# Altium PCB STM32F030K6T6 CH340.PcbDoc
Units mm, origin at the board's own origin, x right, y up, seen from the top; angles counter-clockwise.
Board outline 21.2 x 51.31 mm, 2 copper layers (Top Layer, Bottom Layer); 42 components, 45 nets, 173 pads, 12 vias.
Unrouted connection lines stored in the file: 4.
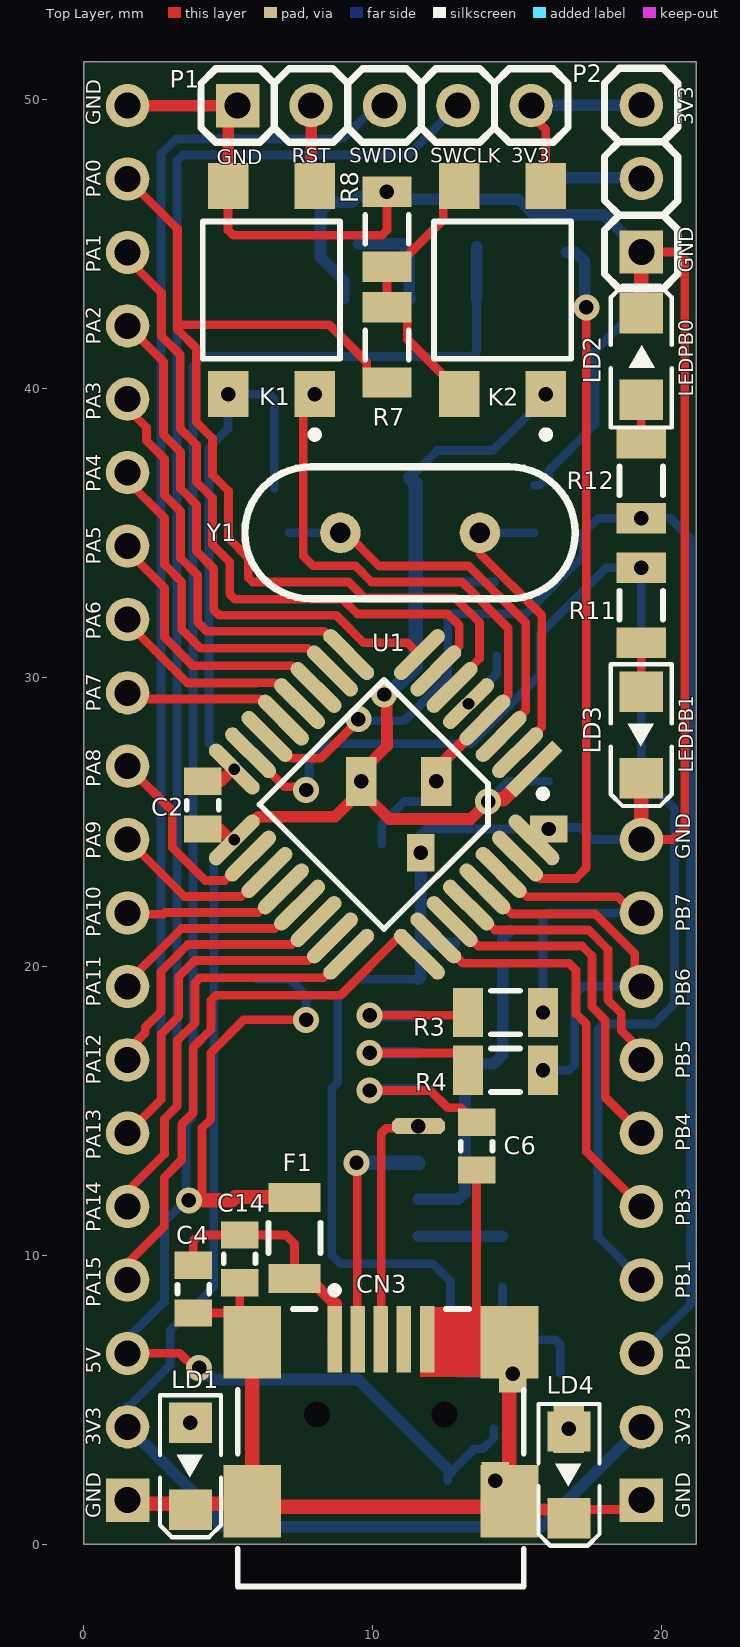
[diagram p0: Top Layer view]
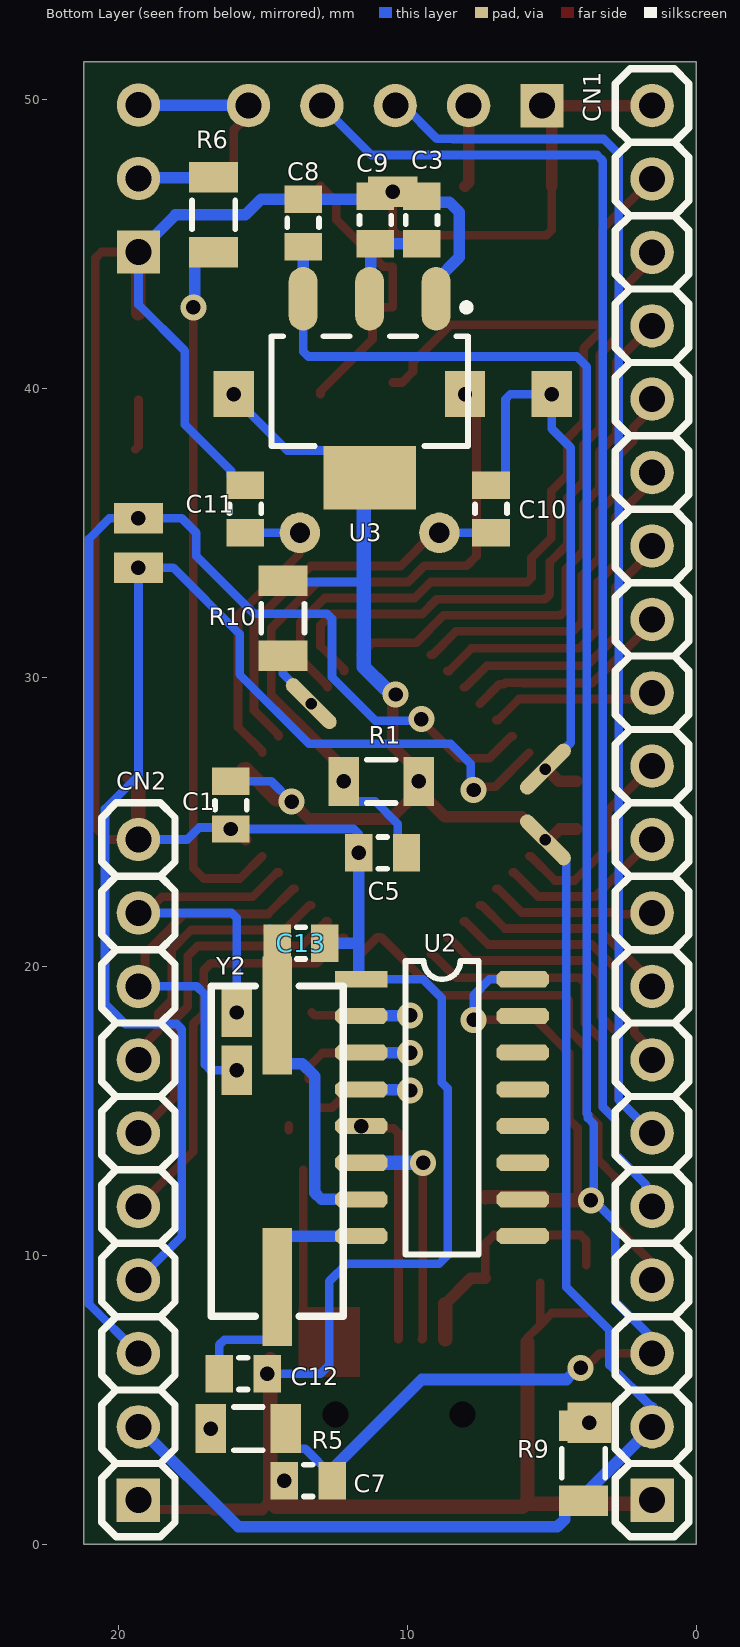
[diagram p1: Bottom Layer view, seen from below]

## Layer stack, top to bottom
Top Solder: solder mask 0.0102, Solder Resist, Dk 3.5
Top Layer: signal copper 0.0356
Dielectric 1: dielectric 0.32, FR-4, Dk 4.8
Bottom Layer: signal copper 0.0356
Bottom Solder: solder mask 0.0102, Solder Resist, Dk 3.5

## Board outline
0,0 21.2,0 21.2,51.308 0,51.308

## Design rules (kind name [scope] priority, off if disabled: settings)
Clearance [All] p1: gap=0.254 ignorepadtopadclearanceinfootprint=FALSE except(0: Arc-Hole Track-Hole SMDPad-Hole THPad-Hole Via-Hole Fill-Hole Poly-Hole Region-Hole Text-Hole)
PolygonConnect [All] p1: connectstyle=Relief reliefconductorwidth=0.254 reliefentries=4 polygonreliefangle="90 Angle" airgapwidth=0.254
RoutingVias [All] p1: holewidth=0.711 width=1.27 viastyle="Through Hole" minholewidth=0.711 minwidth=1.27 maxholewidth=0.711 maxwidth=1.27
SolderMaskExpansion [All] p1: expansion=0.102 istentingtop=FALSE
Width [All] p1: maxlimit=2 minlimit=0.254 preferedwidth=0.3 minimp=50.000000 maximp=50.000000 favimp=50.000000
30 further rules are at their usual default settings.

## Components (designator, comment, footprint, x,y, rotation, side; value= is the part's Value field where it differs from the comment)
C1 "100nF" CAP805#1 16.1,24.75 r90 bottom
C2 "100nF" CAP805#2 4.125,26.4 r270 top
C3 "100nF" CAP805#2 9.5,46.65 r270 bottom
C4 "10uF" CAP805#2 3.8,8 r90 top value=100nF
C5 "100nF" CAP805#1 11.675,23.925 r180 bottom
C6 "100nF" CAP805#2 13.6,12.95 r90 top
C7 "100nF" CAP805#1 14.25,2.2 r180 bottom
C8 "1uF" CAP805#2 13.6,46.55 r270 bottom value=100nF
C9 "1uF" CAP805#2 11.1,46.65 r270 bottom value=100nF
C10 "22pF" CAP805#2 7.1,35 r90 bottom value=100nF
C11 "22pF" CAP805#2 15.6,35 r90 bottom value=100nF
C12 "22pF" CAP805#3 16.5,5.9 r180 bottom value=100nF
C13 "22pF" CAP805#2 14.5,20.8 r180 bottom value=100nF
C14 "100nF" CAP805#2 5.4,9.05 r90 top
CN1 "MHDR_1X20" MHDR1X20-254P 1.524,1.524 r90 bottom locked
CN2 "MHDR_1X10" "MHDR1X10-254P - E" 19.304,1.524 r90 bottom locked
CN3 "USB Mini" USB/SM0.8-6H5 10.287,-0.762 r270 top locked
F1 "1206L025YR" FP-1206L025YR-MFG 7.3,10.6 r270 top
K1 "RESET" FP-TL3305AF260QG-MFG#1 6.5,43.4 r90 top locked
K2 "WAKE UP" FP-TL3305AF260QG-MFG#2 14.5,43.4 r90 top locked
LD1 "LED SMD PACKAGE" LED_SMD_1206#1 3.7,2.7 r90 top
LD2 "LED SMD PACKAGE" LED_SMD_1206#2 19.3,41.1 r270 top
LD3 "LED SMD PACKAGE" LED_SMD_1206#2 19.3,28 r90 top
LD4 "LED SMD PACKAGE" LED_SMD_1206#2 16.8,2.4 r90 top
P1 "MHDR_1X05" MHDR1X05-254P 5.333,49.784 r0 top locked
P2 "" MHDR1X03-254P 19.3,44.72 r90 top locked
R1 "10K" "RES1206 _(3216X08L)"#1 9.604,26.4 r0 bottom value=1K
R3 "1K" "RES1206 _(3216X08L)"#2 13.304,18.4 r0 top
R4 "1K" "RES1206 _(3216X08L)"#2 13.304,16.4 r0 top
R5 "1K" "RES1206 _(3216X08L)"#2 14.2,4 r0 bottom
R6 "10K" "RES1206 _(3216X08L)"#3 16.7,44.704 r90 bottom value=1K
R7 "510R" "RES1206 _(3216X08L)"#3 10.5,40.204 r90 top locked value=1K
R8 "10K" "RES1206 _(3216X08L)"#2 10.5,44.204 r90 top locked value=1K
R9 "1K" "RES1206 _(3216X08L)"#3 3.9,4.1 r270 bottom
R10 "10K" "RES1206 _(3216X08L)"#3 14.3,33.346 r270 bottom value=1K
R11 "510R" "RES1206 _(3216X08L)"#2 19.3,31.2 r90 top value=1K
R12 "510R" "RES1206 _(3216X08L)"#2 19.3,38.096 r270 top value=1K
U1 "STM32F030K6T6" LQFP32 10.4,25.6 r225 top locked
U2 "CH340G" CH340G_C_B(SOP16) 11.588,19.55 r270 bottom locked
U3 "3V3" SOT223 11.3,39.9 r270 bottom locked
Y1 "16Mhz" Crystal 11.3,35 r180 top locked
Y2 "16Mhz" Crystal_smd 14.5,13.6 r270 bottom locked

## Footprints (in the part's own frame and the unit in brackets; to place one, negate y for a bottom-side part, rotate by r counter-clockwise, add the part's x,y. Pads: shape width x height; smd on the part's side, far side on the other; paste and mask are expansions set on the pad)
CAP805#1 [mm]
  rect 0.95x1.3 hole 0.5: 1(0,0)
  rect 0.95x1.3 smd: 2(1.65,0)
  silkscreen extent 0.67,-0.55 0.97,0.55, body extent -0.19,-0.64 1.84,0.63, height 0.65
CAP805#2 [mm]
  rect 0.95x1.3 smd: 1(0,0) 2(1.65,0)
  silkscreen extent 0.67,-0.55 0.97,0.55, body extent -0.19,-0.63 1.84,0.63, height 0.65
CAP805#3 [mm]
  rect 0.95x1.3 smd: 1(0,0)
  rect 0.95x1.3 hole 0.5: 2(1.65,0)
  silkscreen extent 0.67,-0.55 0.97,0.55, body extent -0.19,-0.64 1.84,0.63, height 0.65
CH340G_C_B(SOP16) [mil]
  rect 22x72 smd: 1(0,0)
  oct 22x72 smd: 2(50,0) 3(100,0) 4(150,0) 6(250,0) 7(300,0) 8(350,0) 9(350,220) 10(300,220) 11(250,220) 12(200,220) 13(150,220) 14(100,220) 15(50,220) 16(0,220)
  oct 22x72 hole 19.68: 5(200,0)
  silkscreen extent -25,60 375,160, body extent -20,-8 370,228, height 55
Crystal [mm] "16 Mhz Crystal footprint"
  round 1.4 hole 0.7: 1(-2.413,0) 2(2.413,0)
  silkscreen extent -5.71,-2.29 5.71,2.29, body extent -5.59,-2.26 5.59,2.41, height 3.63
Crystal_smd [mil] "16 Mhz Crystal footprint"
  rect 160.63x40 smd: 1(-185,0) 2(185,0)
  silkscreen extent -225,-90 225,90, body extent -246,-94 246,94, height 162
FP-1206L025YR-MFG [mm]
  rect 1x1.8 smd paste+0 mask+0: 1(-1.4,0) 2(1.4,0)
  silkscreen extent -0.53,-0.9 0.53,0.9, body extent -2,-1 2,1, height 0.25
FP-TL3305AF260QG-MFG#1 [mm]
  rect 1.6x1.4 hole 0.5 paste+0 mask+0: 1(-3.6,-1.5) 3(-3.6,1.5)
  rect 1.6x1.4 smd paste+0 mask+0: 2(3.6,-1.5) 4(3.6,1.5)
  silkscreen extent -5.12,-2.37 2.37,2.37, body extent -4.5,-2.47 4.5,2.47, height 0.25
FP-TL3305AF260QG-MFG#2 [mm]
  rect 1.6x1.4 hole 0.5 paste+0 mask+0: 1(-3.6,-1.5)
  rect 1.6x1.4 smd paste+0 mask+0: 2(3.6,-1.5) 3(-3.6,1.5) 4(3.6,1.5)
  silkscreen extent -5.12,-2.37 2.37,2.37, body extent -4.5,-2.47 4.5,2.47, height 0.25
LED_SMD_1206#1 [mm] "SMD Mono-color Chip LED, body 3.2x1.6mm"
  rect 1.4x1.5 smd: 1(-1.5,0)
  rect 1.4x1.5 hole 0.5: 2(1.5,0)
  silkscreen extent -2.45,-1.05 2.45,1.05, body extent -1.6,-0.8 1.6,0.8, height 0.68
LED_SMD_1206#2 [mm] "SMD Mono-color Chip LED, body 3.2x1.6mm"
  rect 1.4x1.5 smd: 1(-1.5,0) 2(1.5,0)
  silkscreen extent -2.45,-1.05 2.45,1.05, body extent -1.6,-0.8 1.6,0.8, height 0.68
LQFP32 [mil] "32-Pin Thin Quad Flat Pack 0.8 mm Pitch"
  rect 90x20 smd: 1(-178.39,110.24)
  oval 90x20 smd: 2(-178.39,78.74) 3(-178.39,47.24) 4(-178.39,15.75) 6(-178.39,-47.24) 7(-178.39,-78.74) 8(-178.39,-110.24) 18(178.39,-78.74) 19(178.39,-47.24) 20(178.39,-15.75) 21(178.39,15.75) 22(178.39,47.24) 23(178.39,78.74) 24(178.39,110.24)
  oval 90x20 hole 15.75: 5(-178.39,-15.75) 17(178.39,-110.24)
  oval 20x90 smd: 9(-110.24,-178.39) 10(-78.74,-178.39) 11(-47.24,-178.39) 12(-15.75,-178.39) 13(15.75,-178.39) 14(47.24,-178.39) 15(78.74,-178.39) 25(110.24,178.39) 26(78.74,178.39) 27(47.24,178.39) 28(15.75,178.39) 29(-15.75,178.39) 30(-47.24,178.39) 31(-78.74,178.39) 32(-110.24,178.39)
  oval 20x90 hole 15.75: 16(110.24,-178.39)
  silkscreen extent -168,-120 120,148, body extent -179,-179 179,179, height 56
MHDR1X03-254P [mm] "Male Header 1X03 with 2.54 mm Pitch"
  rect 1.5x1.5 hole 0.9: 1(0,0)
  round 1.5 hole 0.9: 2(2.54,0) 3(5.08,0)
  silkscreen extent -1.27,-1.27 6.35,1.27, body extent -1.27,-1.27 6.35,1.27, height 8.43
MHDR1X05-254P [mm] "Male Header 1X05 with 2.54 mm Pitch"
  rect 1.5x1.5 hole 0.9: 1(0,0)
  round 1.5 hole 0.9: 2(2.54,0) 3(5.08,0) 4(7.62,0) 5(10.16,0)
  silkscreen extent -1.27,-1.27 11.43,1.27, body extent -1.27,-1.27 11.43,1.27, height 8.43
"MHDR1X10-254P - E" [mm] "Male Header 1X10 with 2.54 mm Pitch"
  rect 1.5x1.5 hole 0.9: 1(0,0)
  round 1.5 hole 0.9: 2(2.54,0) 3(5.08,0) 4(7.62,0) 5(10.16,0) 6(12.7,0) 7(15.24,0) 8(17.78,0) 9(20.32,0) 10(22.86,0)
  silkscreen extent -1.27,-1.27 24.13,1.27, body extent -1.27,-1.27 24.13,1.27, height 8.43
MHDR1X20-254P [mm] "Male Header 1X20 with 2.54 mm Pitch"
  rect 1.5x1.5 hole 0.9: 1(0,0)
  round 1.5 hole 0.9: 2(2.54,0) 3(5.08,0) 4(7.62,0) 5(10.16,0) 6(12.7,0) 7(15.24,0) 8(17.78,0) 9(20.32,0) 10(22.86,0) 11(25.4,0) 12(27.94,0) 13(30.48,0) 14(33.02,0) 15(35.56,0) 16(38.1,0) 17(40.64,0) 18(43.18,0) 19(45.72,0) 20(48.26,0)
  silkscreen extent -1.27,-1.27 49.53,1.27, body extent -1.27,-1.27 49.53,1.27, height 8.43
"RES1206 _(3216X08L)"#1 [mm] "Chip Resistor, 2-Leads, Body 3.2x1.6mm, IPC High Density _ (0.125 W)"
  rect 1.05x1.7 hole 0.5: 1(0,0) 2(2.596,0)
  silkscreen extent 0.8,-0.75 1.8,0.75, body extent -0.23,-0.76 2.82,0.76, height 0.6
"RES1206 _(3216X08L)"#2 [mm] "Chip Resistor, 2-Leads, Body 3.2x1.6mm, IPC High Density _ (0.125 W)"
  rect 1.05x1.7 smd: 1(0,0)
  rect 1.05x1.7 hole 0.5: 2(2.596,0)
  silkscreen extent 0.8,-0.75 1.8,0.75, body extent -0.23,-0.76 2.82,0.76, height 0.6
"RES1206 _(3216X08L)"#3 [mm] "Chip Resistor, 2-Leads, Body 3.2x1.6mm, IPC High Density _ (0.125 W)"
  rect 1.05x1.7 smd: 1(0,0) 2(2.596,0)
  silkscreen extent 0.8,-0.75 1.8,0.75, body extent -0.23,-0.76 2.82,0.76, height 0.6
SOT223 [mm] "SOT223, 4-Leads, Body 6.5x3.5mm, Pitch 2.30mm-Designer Abbas Basereh"
  oval 2.2x1 smd: 1(-3.2,2.3) 2(-3.2,0) 3(-3.2,-2.3)
  rect 2.2x3.2 smd: 4(3,0)
  Top Layer pour cut-out: -1.7,3.556 1.7,3.556 1.7,-3.556 -1.7,-3.556
  silkscreen extent -3.02,-3.4 1.9,3.47, body extent -3.5,-3.25 3.5,3.25, height 1.7
USB/SM0.8-6H5 [mm] "Connector; USB2.0, Type B, SM; 5 Position; Right Angle"
  rect 2.3x0.5 smd: 1(-7.85,-1.6) 2(-7.85,-0.8) 3(-7.85,0) 4(-7.85,0.8) 5(-7.85,1.6)
  rect 2.5x2 smd: 6(-7.75,4.45) 7(-2.25,4.45) 8(-7.75,-4.45) 9(-2.25,-4.45)
  round 0.6 hole 0.9 unplated: MH1(-5.25,2.2) MH2(-5.25,-2.2)
  silkscreen extent -9.67,-4.95 0.7,4.95, body extent -8.6,-4.95 0.65,4.95, height 3.93

## Part data
C1 C2 C3 C4 C5 C6 C7 C8 C9 C10 C11 C12 C13 C14: library part "CAP SMD", Desc.="CAP SMD TOTAL PACKAGES", designer="Majid Derhambakhsh"
CN1: "Male Header 1X20"
CN2: "Male Header 1X10"
CN3: library part "USB mini", "mini USB Connector"
F1: library part CMP-08606-000079-1, "PTC RESET FUSE 16V 250MA 1206", Case Code (Imperial)=1206, Case Code (Metric)=3216, Current Rating=100A, Hold Current=250mA, Max Operating Temperature=85°C, Max Power Dissipation=600mW, Max Voltage Rating (DC)=16V, Min Operating Temperature=-40°C, Package Quantity=4000, Resistance=2.3R, Trip Current=500mA, Approvals=cULus, Case/Package=1206, Height=1mm, Lead Free="Lead Free", Length=3.4mm, Max Current Rating=100A, Operating Supply Voltage=16V, Packaging="Tape and Reel", Power Dissipation=600mW, REACH SVHC="No SVHC", RoHS Compliant=Yes, Series=1206L, Terminal Material=Copper, Termination=SMD/SMT, Time to Trip=0.08s, Voltage Rating=16V, Voltage Rating (DC)=16V, Width=1.8mm, Working Voltage=16V
K1 K2: library part CMP-17879-000010-1, "SWITCH TACTILE SPST-NO 50MA 12V", Max Operating Temperature=70°C, Min Operating Temperature=-20°C, Operating Force=260gf, Actuator Type=Standard, Illumination Type=Non-Illuminated, Lead Free="Lead Free", Mechanical Life=200000Cycles, Mount="Surface Mount", Packaging="Tape and Reel", Switch Function=Off-Mom, Switch Travel=0.2mm, Termination="Gull Wing", Throw Configuration=SPST
LD1 LD2 LD3 LD4: "SMD Mono-color Chip LED Waterclear", Forward Voltage="3.2 V", Part Number=150080BS75000, Peak Wavelength="465 nm", Published Date="Jan 2017", Publisher="Ali Hafizi"
P1: "Male Header 1X05"
P2: library part MHDR_1X03, "Male Header 1X03"
R1 R3 R4 R5 R6 R7 R8 R9 R10 R11 R12: library part "RES SMD", "TOTAL SMD RESISTOR PACK", Data=2017-3-10, Desc.="RES SMD PAKAGES", designer="Majid Derhambakhsh"
U1: "ARM Microcontrollers - MCU Value-Line ARM MCU 32kB 48 MHz", Link=http://javanelec.com/productsDetails.aspx?id=32660
U2: library part CH340G_C_B
U3: library part AMS1117-x.x, "x.x Volt, 800mA Low-Dropout Linear Regulator, 4-pin SOT-223", Data=16-12-2016, designer="Ali Hafizi"
Y1 Y2: library part XTAL, "Crystal Oscillator", LatestRevisionDate=17-Jul-2002, LatestRevisionNote="Re-released for DXP Platform.", PackageReference=R38, Published=8-Jun-2000, Publisher="Altium Limited"

## Via types
v1: diameter 0.9, hole 0.5, Top Layer to Bottom Layer, tented both sides, 12 vias

## Nets (pads, with @x,y where several pads share a name; then routed paths per layer and width w, separated by ;. In a path a pad name is that pad's centre, name@x,y a point inside that pad or via, vN(x,y) a via of type N, cw(c..) or ccw(c..) an arc to the next point about the centre after c; other vN are vias at no path point)
3V3: C1.2 C2.2 C3.2 C9.2 CN1.2 CN2.2 K2.1 K2.2 P1.5 P2.3 R1.1 R9.2 R10.1 U1.1 U1.17 U3.2 U3.4 | length 89.8
  Top Layer w0.3: P1.5 15.493,49.459 16,48.952 K2.2
  Top Layer w0.4: C2.2 4.72,24.75 5.12,24.35 5.19,24.35 U1.17 5.245,24.376 6.043,25.174 8.703,25.174 R1.1@9.604,26.075 ; v1(10.4,29.405) 10.496,29.309 10.496,28.425 10.5,28.421 10.5,27.621 9.604,26.725 R1.1@9.604,26.075 ; v1(14,25.7) 13.396,25.096 10.583,25.096 R1.1@9.604,26.075 ; U1.1@15.562,26.824 15.578,26.824 U1.1 ; U1.1@15.61,26.85 U1.1@15.686,26.85
  Top Layer w0.5: v1(14,25.7) 14.077,25.777 14.531,25.777 U1.1@15.578,26.824
  Bottom Layer w0.3: CN1.2@1.524,4.724 3,6.2 3,7.4 4.5,8.9 4.5,23.66 U1.17 ; U3.4 12.25,37.85 14.15,37.85 16,39.7 K2.1 ; 11.5,33.3 R10.1@14.235,33.3 ; v1(14,25.7) 14.7,26.4 C1.2
  Bottom Layer w0.4: CN1.2@1.524,4.724 CN1.2 R9.2@4.084,1.504 ; R9.2 4.225,1.504 4.55,1.179 4.55,0.854 4.804,0.6 15.84,0.6 CN2.2 ; C3.2 C9.2@10.99,45 ; C9.2 C9.2@10.99,45 ; U3.2 11.265,43.135 11.265,44.725 C9.2@10.99,45 ; P1.5 15.501,49.792 19.292,49.792 P2.3
  Bottom Layer w0.5: v1(10.4,29.405) 10.508,29.405 10.704,29.6 10.745,29.6 11.5,30.355 11.5,33.3 11.5,36.7 U3.4
+5: C7.2 C8.2 CN1.3 F1.1 R5.1 U2.16 U3.3 | length 79.7
  Top Layer w0.3: CN1.3 3.334,6.604 3.838,6.1 v1(4,6.1) ; 4.1,12 4.1,14.4 4.4,14.7 4.4,17 5.546,18.146 v1(7.7,18.146)
  Top Layer w0.5: v1(3.646,11.9) 5.136,11.9 5.25,12.014 7.285,12.014 F1.1
  Bottom Layer w0.3: CN1.3 1.524,7.124 2.8,8.4 2.8,11.158 v1@3.542,11.9 ; v1(3.646,11.9) v1@3.542,11.9 ; U2.16 7.15,19.55 7.7,19 v1(7.7,18.146) ; C7.2 12.6,2.375 13.525,3.3 13.825,3.3 14.2,3.675 R5.1 ; U3.3 13.6,41.276 13.424,41.1 4.134,41.1 3.786,40.752 3.786,14.903 3.746,14.863 3.746,14.746 3.542,14.542 v1@3.542,11.9
  Bottom Layer w0.4: v1(4,6.1) 4.084,6.1 4.484,5.7 9.5,5.7 C7.2@12.7,2.5 ; U3.3 C8.2
BOOT0: R6.1 U1.31 | length 24.6
  Top Layer w0.3: U1.31 15.789,23.039 17.039,23.039 17.4,23.4 v1(17.4,42.8)
  Bottom Layer w0.4: R6.1 17.025,44.704 17.35,44.379 17.35,42.85 v1(17.4,42.8)
D+: CN3.3 U2.5 | length 8.5
  Top Layer w0.3: CN3.3 10.3,7.101 10.3,14.217 10.476,14.392 11.51,14.392 U2.5
D-: CN3.2 U2.6 | length 8.3
  Top Layer w0.3: v1(9.446,13.2) 9.466,13.18 9.466,7.108 CN3.2
  Bottom Layer w0.4: U2.6@11.577,13.189 U2.6
  Bottom Layer w0.5: v1(9.446,13.2) 11.566,13.2 U2.6@11.577,13.189
GND: C1.1 C2.1 C3.1 C4.1 C5.1 C6.1 C7.1 C8.1 C9.1 C10.2 C11.2 C12.2 C13.2 C14.1 CN1.1 CN1.20 CN2.1 CN2.10 CN3.5 CN3.6 CN3.7 CN3.8 CN3.9 K1.3 K1.4 LD1.1 LD2.1 LD3.1 LD4.1 P1.1 P2.1 R8.2 U1.16 U1.32 U2.1 U3.1 | length 162.3
  Top Layer w0.254: CN3.9@5.749,1.4 CN3.9
  Top Layer w0.3: C4.1 4.987,8 CN3.8@5.4,7.587 ; K1.4 5,45.476 5.176,45.3 10.324,45.3 10.5,45.476 R8.2 ; C14.1 CN3.8@5.4,7.587 ; CN3.8 5.837,7.15 CN3.8@5.4,7.587 ; 13.6,7.6 C6.1 ; LD4.1@16.7,1.2 18.98,1.2 CN2.1 ; P2.1 20.58,44.72 20.8,44.5 20.8,24.8 20.384,24.384 CN2.10 ; LD3.1@19.404,26.204 LD3.1@19.7,26.5
  Top Layer w0.4: CN1.20 P1.1 5,49.451 K1.4 ; C2.1 4.75,26.4 5.174,26.824 U1.16 ; CN3.7 15.025,1.2 LD4.1@16.7,1.2 ; U1.32 15.584,24.384 C1.1@16,24.8 ; LD3.1 LD3.1@19.304,26.496
  Top Layer w0.5: CN1.1 1.648,1.4 CN3.9@5.749,1.4 ; CN3.8 CN3.9 6.025,1.3 14.549,1.3 CN3.7 CN3.6@14.737,6.4 ; LD2.1 P2.1 ; CN2.10 LD3.1@19.304,26.304
  Bottom Layer w0.3: U1.16 5.216,26.856 4.34,27.732 4.34,37.94 5,38.6 K1.3 6.424,39.8 6.6,39.624 C10.2@6.6,36.526 ; U2.1 9.45,19.55 8.8,18.9 8.8,15.977 8.592,15.769 8.592,10.008 8.9,9.7 12.1,9.7 12.7,9.1 12.7,6.2 13,5.9 C12.2 ; C5.1 11.675,24.575 11.85,24.75 C1.1 16.15,24.8 17.2,24.8 17.616,24.384 CN2.10 ; C11.2 15.775,36.65 16.1,36.975 16.1,37.15 17.7,38.75 17.7,41.3 19.3,42.9 P2.1
  Bottom Layer w0.4: U3.1 9,43.733 8.2,44.533 8.2,46.1 8.538,46.438 9.288,46.438 C3.1 R8.2@10.5,46.65 ; R8.2 10.75,46.55 C8.1 15.05,46.55 15.6,46 18.02,46 P2.1 ; R8.2@10.75,46.65 C9.1 ; U2.1 11.596,19.55 11.675,19.629 C5.1 ; 11.7,20.8 C13.2
NetC6_2: C6.2 U2.4 | length 5.6
  Top Layer w0.3: v1(9.9,15.7) 12,15.7 12.6,15.1 13.05,15.1 C6.2@13.25,14.9 ; C6.2@14.1,14.325 C6.2@14.1,14.5
  Bottom Layer w0.4: v1(9.9,15.7) 9.92,15.72 11.568,15.72 U2.4
NetK2_3: K2.3 K2.4 R7.2 R8.1 | length 9.7
  Top Layer w0.3: K2.3 13,39.9 11.2,41.7 11.2,42.425 10.825,42.8 R7.2 R8.1 10.825,44.204 12.45,45.829 12.45,46.45 K2.4
NetLD1_2: LD1.2 R9.1
NetLD2_2: LD2.2 R12.1 | length 1.7
  Top Layer w0.3: LD2.2 19.3,37.996 R12.1@19.4,37.896
NetLD3_2: LD3.2 R11.1 | length 1.6
  Top Layer w0.3: LD3.2@19.3,29.6 R11.1
NetLD4_2: LD4.2 R5.2
NetP2_2: P2.2 R6.2 | length 2.6
  Bottom Layer w0.4: R6.2 16.72,47.28 19.28,47.28 P2.2
NetR3_1: R3.1 U2.2 | length 5.1
  Top Layer w0.3: v1(9.9,18.3) 13.204,18.3 R3.1
  Bottom Layer w0.4: v1(9.9,18.3) 9.91,18.29 11.578,18.29 U2.2
NetR4_1: R4.1 U2.3 | length 5.8
  Top Layer w0.3: v1(9.9,17) 12.929,17 13.4,16.529 R4.1@13.4,16.1
  Bottom Layer w0.4: v1(9.9,17) 9.905,17.005 11.583,17.005 U2.3
NRST: C5.2 K1.1 K1.2 P1.2 R1.2 U1.4 | length 26.4
  Top Layer w0.3: K1.1 7.6,39.4 7.6,34.2 7.944,33.856 9.409,33.856 9.965,33.3 13.083,33.3 13.183,33.2 13.2,33.2 14.7,31.7 14.7,29.391 13.887,28.577 U1.4
  Top Layer w0.4: P1.2 7.873,47.127 K1.2 ; R1.2 12.2,26.834 U1.4
  Bottom Layer w0.3: C5.2@10.325,24.225 10.325,24.925 11.1,25.7 11.825,25.7 12.2,26.075 R1.2
OS1: C10.1 U1.3 Y1.2 | length 13.8
  Top Layer w0.3: Y1.2 9.081,35 10.227,33.854 13.329,33.854 15.3,31.883 15.3,28.859 14.452,28.012 U1.3
  Bottom Layer w0.3: C10.1 Y1.2
OS2: C11.1 U1.2 Y1.1 | length 10.7
  Top Layer w0.3: Y1.1 13.713,34.287 15.854,32.146 15.854,28.282 15.018,27.446 U1.2
  Bottom Layer w0.3: Y1.1 C11.1
PA0: CN1.19 R7.1 U1.6 | length 35.1
  Top Layer w0.3: CN1.19 3.254,45.514 3.254,42.2 ; R7.1 10.175,40.204 9.8,40.579 9.8,40.904 8.504,42.2 3.254,42.2 ; U1.6 12.755,29.707 13.7,30.651 13.7,31.9 12.854,32.746 9.735,32.746 9.181,33.3 5.85,33.3 5.7,33.45 5.7,34.134 5.016,34.818 5.016,36.446 4.462,37 4.462,38.267 3.896,38.833 3.896,41.387 3.283,42 3.254,42.029 3.254,42.2
PA1: CN1.18 U1.7 | length 23.6
  Top Layer w0.3: CN1.18 1.524,44.476 2.7,43.3 2.7,41.8 3.342,41.158 3.342,38.603 3.908,38.037 3.908,36.759 4.462,36.205 4.462,34.588 5.062,33.988 5.062,32.876 5.238,32.7 8.974,32.7 9.482,32.192 12.608,32.192 13,31.8 13,31.085 12.19,30.274 U1.7
PA2: CN1.17 U1.8 | length 18.8
  Top Layer w0.3: CN1.17 2.766,40.922 2.766,38.396 3.354,37.808 3.354,36.529 3.908,35.975 3.908,34.359 4.508,33.759 4.508,32.33 4.692,32.146 8.744,32.146 9.69,31.2 11.208,31.2 U1.8
PA3: CN1.16 U1.9 | length 14.4
  Top Layer w0.3: CN1.16 1.524,39.299 2.178,38.645 2.178,38.187 2.8,37.565 2.8,36.3 3.354,35.746 3.354,34.129 3.954,33.529 3.954,31.9 4.262,31.592 8.312,31.592 9.12,30.784 U1.9
PA4: CN1.15 U1.10 | length 12
  Top Layer w0.3: CN1.15 1.524,36.793 2.8,35.517 2.8,33.9 3.4,33.3 3.4,31.654 4.054,31 7.772,31 8.554,30.218 U1.10
PA5: CN1.14 U1.11 | length 9.7
  Top Layer w0.3: CN1.14 1.524,34.376 2.8,33.1 2.8,31.383 3.783,30.4 7.241,30.4 7.988,29.652 U1.11
PA6: CN1.13 U1.12 | length 7.2
  Top Layer w0.3: CN1.13 1.524,31.876 3.6,29.8 6.004,29.8 6.012,29.808 6.611,29.808 6.663,29.755 6.811,29.755 U1.12
PA7: CN1.12 U1.13 | length 5.8
  Top Layer w0.3: CN1.12 1.742,29.246 6.132,29.246 6.857,28.521 U1.13
PA8: CN1.11 U1.18 | length 7
  Top Layer w0.3: CN1.11 3.071,25.377 3.071,24.108 4.209,22.97 4.885,22.97 5.726,23.81 U1.18
PA9: CN1.10 U1.19 | length 6
  Top Layer w0.3: CN1.10 3.492,22.416 5.463,22.416 6.291,23.245 U1.19
PA10: CN1.9 U1.20 | length 5.8
  Top Layer w0.3: CN1.9 1.568,21.8 2.756,21.8 2.818,21.862 6.04,21.862 6.857,22.679 U1.20
PA11: CN1.8 U1.21 | length 7.2
  Top Layer w0.3: CN1.8 1.524,19.445 3.387,21.308 6.617,21.308 7.423,22.113 U1.21
PA12: CN1.7 U1.22 | length 9.6
  Top Layer w0.3: CN1.7 1.524,17.089 2.138,17.703 2.138,17.888 2.678,18.428 2.678,19.815 3.617,20.754 7.195,20.754 7.988,21.548 U1.22
PA13: CN1.6 P1.3 U1.23 | length 54.8
  Top Layer w0.3: CN1.6 2.692,15.392 2.692,17.659 3.3,18.267 3.3,19.654 3.846,20.2 7.772,20.2 8.554,20.982 U1.23
  Bottom Layer w0.3: CN1.6 2.678,15.378 2.678,48.108 3.2,48.63 8.422,48.63 8.428,48.636 8.975,48.636 10.123,49.784 P1.3
PA14: CN1.5 P1.4 U1.24 | length 61.9
  Top Layer w0.3: CN1.5 1.524,12.224 2.8,13.5 2.8,14.717 3.246,15.163 3.246,17.429 3.854,18.037 3.854,19.424 4.03,19.6 8.304,19.6 9.12,20.416 U1.24
  Bottom Layer w0.3: CN1.5 1.754,11.914 1.754,12.454 2.8,13.5 2.8,14.7 3.232,15.132 3.232,47.878 3.43,48.076 11.245,48.076 P1.4
PA15: CN1.4 U1.25 | length 19.2
  Top Layer w0.3: CN1.4 1.524,9.724 2.792,10.992 2.792,12.692 3.4,13.3 3.4,14.533 3.8,14.933 3.8,17.2 4.408,17.808 4.408,18.824 4.584,19 8.9,19 10.902,21.002 11.038,21.002 U1.25
PB0: CN2.3 R12.2 U1.14 | length 49.3
  Top Layer w0.3: U1.14 6.404,27.955 7.159,27.2 8.211,27.2 9.508,28.498 v1(9.508,28.554)
  Bottom Layer w0.3: v1(9.508,28.554) 9.562,28.5 11.1,28.5 12.6,30 12.6,32.024 12.776,32.2 15.3,32.2 17.3,34.2 17.3,35 17.8,35.5 R12.2 20.3,35.5 21.012,34.788 21.012,8.312 CN2.3
PB1: CN2.4 R11.2 U1.15 | length 46.4
  Top Layer w0.3: U1.15 6.957,26.215 7.585,26.215 v1(7.7,26.1)
  Bottom Layer w0.3: v1(7.7,26.1) 7.8,26.2 7.8,27 8.5,27.7 13.4,27.7 15.8,30.1 15.8,31.5 18.096,33.796 18.975,33.796 R11.2 19.3,26.6 20.458,25.442 20.458,18.712 19.746,18 17.976,18 17.8,17.824 17.8,10.648 CN2.4
PB3: CN2.5 U1.26 | length 14.4
  Top Layer w0.3: U1.26 12.246,20.982 13.125,20.103 16.797,20.103 17.042,19.858 17.042,18.367 17.4,18.009 17.4,13.588 CN2.5
PB4: CN2.6 U1.27 | length 12.2
  Top Layer w0.3: U1.27 12.812,21.548 13.659,20.7 17.249,20.7 17.596,20.353 17.596,18.597 18.058,18.134 18.058,15.47 CN2.6
PB5: CN2.7 U1.28 | length 9.8
  Top Layer w0.3: U1.28 13.377,22.113 14.237,21.254 17.479,21.254 18.15,20.583 18.15,18.826 18.612,18.364 18.612,17.769 19.304,17.077 CN2.7
PB6: CN2.8 R4.2 U1.29 | length 13.4
  Top Layer w0.3: U1.29 13.943,22.679 14.814,21.808 17.708,21.808 19.074,20.442 19.074,19.534 CN2.8
  Bottom Layer w0.3: R4.2 16.8,16.4 17,16.6 17,19.024 17.28,19.304 CN2.8
PB7: CN2.9 R3.2 U1.30 | length 12.2
  Top Layer w0.3: U1.30 14.509,23.245 15.353,22.4 18.492,22.4 19.048,21.844 CN2.9
  Bottom Layer w0.3: R3.2 15.9,21.668 16.076,21.844 CN2.9
VCC: C4.2 C14.2 CN3.1 F1.2 | length 8.7
  Top Layer w0.3: C4.2 3.8,10.5 4,10.7 C14.2 7,10.7 7.3,10.4 F1.2
  Top Layer w0.4: F1.2 7.8,9.2 8.687,8.313
  Top Layer w0.5: CN3.1 8.687,8.313
VDDA: R10.2 U1.5 | length 2.1
  Top Layer w0.3: U1.5 U1.5@13.321,29.089
  Bottom Layer w0.3: U1.5 13.321,29.143 14.3,30.122 R10.2
XI: C13.1 U2.7 Y2.1 | length 11
  Bottom Layer w0.4: U2.7 12.966,11.93 13.2,12.164 13.2,16.2 13.626,16.626 14.192,16.626 14.5,16.934 14.5,18.93 Y2.1@14.5,19.998 ; C13.1 14.5,20.975 C13.1@14.775,21.25
XO: C12.1 U2.8 Y2.2 | length 7.6
  Bottom Layer w0.3: Y2.2 14.5,7.435 14.858,7.077 16.324,7.077 16.5,6.901 C12.1
  Bottom Layer w0.4: U2.8 Y2.2@14.292,10.66 ; Y2.2@14.292,10.659 Y2.2@14.492,10.659
pads on no net: CN3.4 CN3.MH1 CN3.MH2 U2.9 U2.10 U2.11 U2.12 U2.13 U2.14 U2.15

## Other copper
Top Layer:
  region net GND: 11.65,8.2 13.75,8.2 13.75,5.8 11.65,5.8

## Silkscreen, mask and mechanical layers (free items; w line width, h text height)
Top Overlay:
  text "GND" at 0.6,49.1 h0.5 r90
  text "3V3" at 21.1,49.1 h0.5 r90
  text "RST" at 7.2,47.8 h0.5
  text "SWDIO" at 9.2,47.8 h0.5
  text "SWCLK" at 12,47.8 h0.5
  text "3V3" at 14.8,47.8 h0.5
  text "GND" at 4.617,47.756 h0.5
  text "PA0" at 0.6,46.6 h0.5 r90
  text "PA1" at 0.6,44 h0.5 r90
  text "GND" at 21.1,44 h0.5 r90
  text "PA2" at 0.6,41.5 h0.5 r90
  text "LEDPB0" at 21.1,39.7 h0.5 r90
  text "PA3" at 0.6,38.9 h0.5 r90
  text "PA4" at 0.6,36.4 h0.5 r90
  text "PA5" at 0.6,33.9 h0.5 r90
  text "PA6" at 0.6,31.3 h0.5 r90
  text "PA7" at 0.6,28.8 h0.5 r90
  text "LEDPB1" at 21.1,26.7 h0.5 r90
  text "PA8" at 0.6,26.2 h0.5 r90
  text "PA9" at 0.6,23.7 h0.5 r90
  text "GND" at 21,23.7 h0.5 r90
  text "PB7" at 21,21.2 h0.5 r90
  text "PA10" at 0.6,21 h0.5 r90
  text "PA11" at 0.6,18.6 h0.5 r90
  text "PB6" at 21,18.6 h0.5 r90
  text "PB5" at 21,16.1 h0.5 r90
  text "PA12" at 0.6,15.9 h0.5 r90
  text "PB4" at 21,13.6 h0.5 r90
  text "PA13" at 0.6,13.3 h0.5 r90
  text "PB3" at 21,11 h0.5 r90
  text "PA14" at 0.6,10.8 h0.5 r90
  text "PB1" at 21,8.5 h0.5 r90
  text "PA15" at 0.6,8.2 h0.5 r90
  text "PB0" at 21,6 h0.5 r90
  text "5V" at 0.6,5.9 h0.5 r90
  text "3V3" at 0.6,3.4 h0.5 r90
  text "3V3" at 21,3.4 h0.5 r90
  text "GND" at 0.6,0.9 h0.5 r90
  text "GND" at 21,0.9 h0.5 r90

## Text inside footprints (layer, text, board x,y; h text height)
CN3: Mechanical 1 "PCB Edge" at 6.251,-1.194 h0.25